# EAGLE board Atmega32_CS_ProgBoard (EAGLE 6.1)
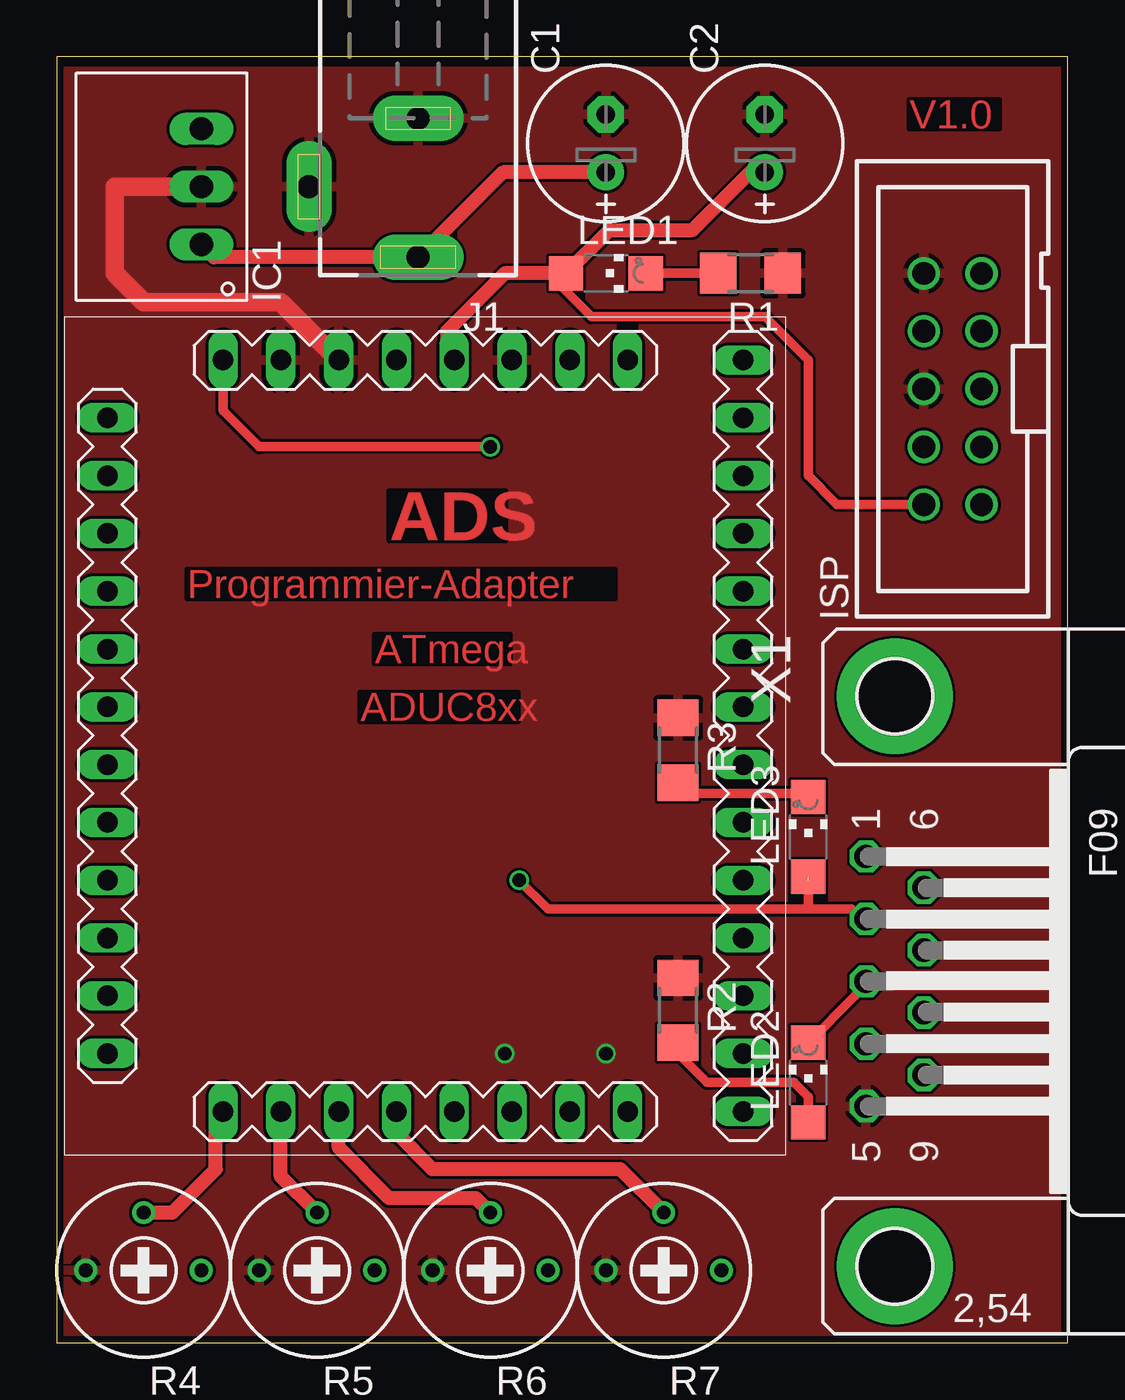
[diagram p0: board, top side]
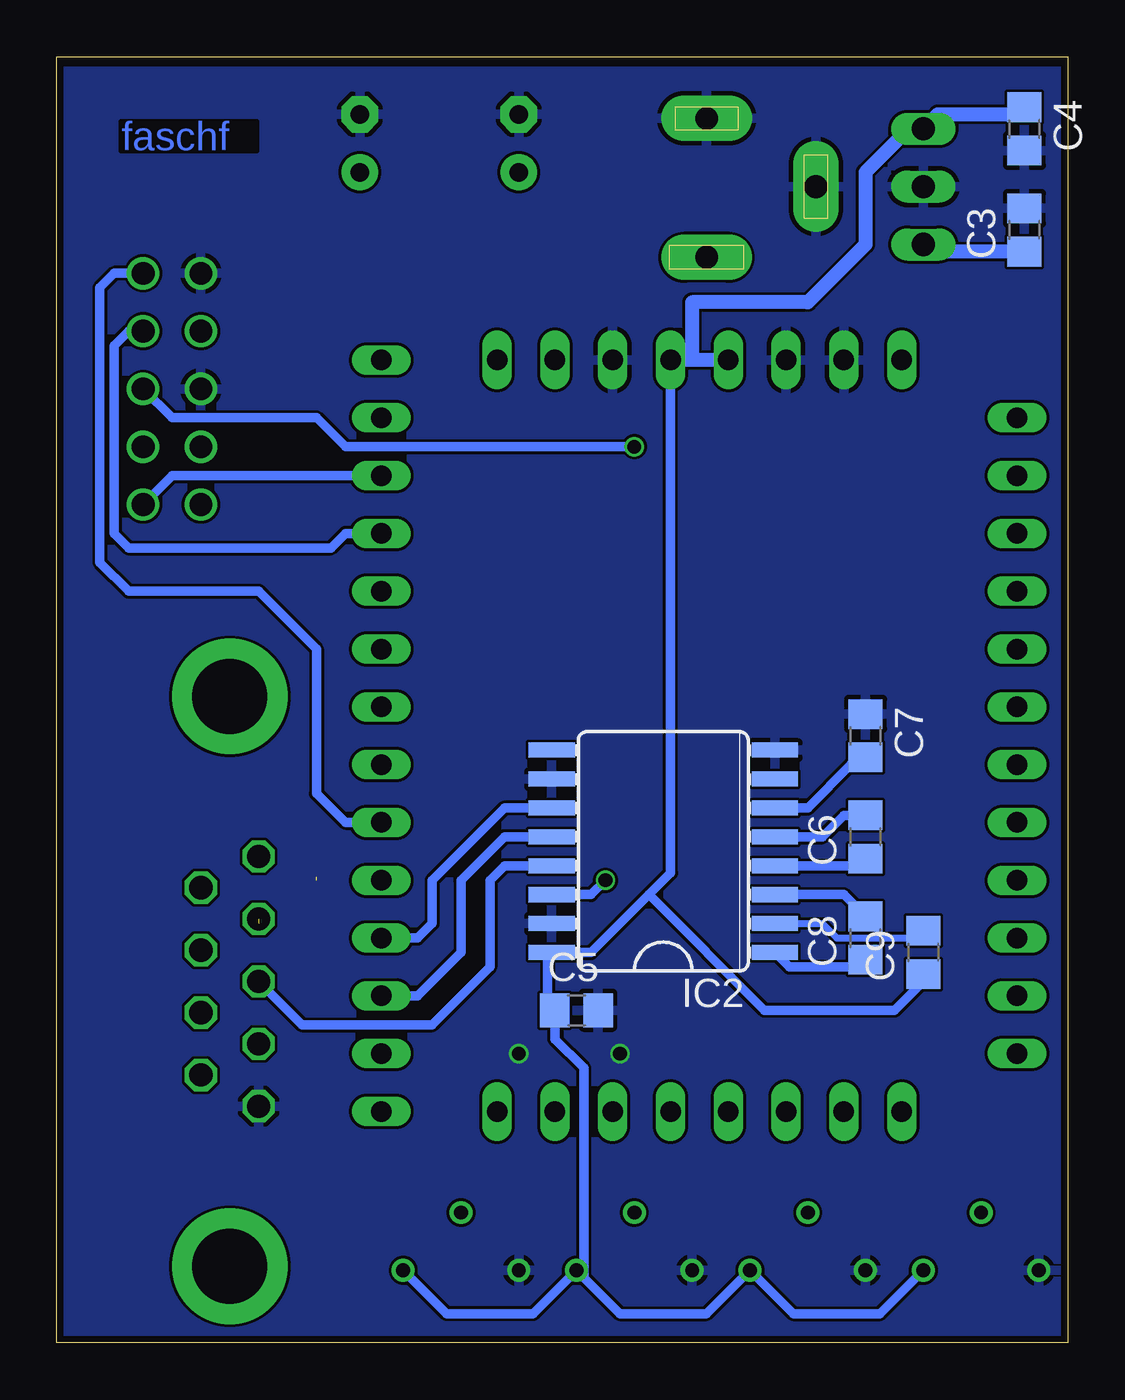
[diagram p1: board, bottom side, seen from below]

Size 44.43 x 56.5 mm. Coordinates in mm from the lower left corner, seen from the top.
Outline: 0,0 44.43,0 44.43,56.5 0,56.5 0,0
Copper layers (1*16): Top 0.035mm / dielectric 1.5mm / Bottom 0.035mm
Design rules: minimum track width 0.125mm, minimum drill 0.2mm, track to track 0.125mm, track to pad 0.125mm, pad to pad 0.125mm, via to via 0.125mm, smd to smd 0.125mm, copper to edge 0.3mm, drill to drill 0.2mm, minimum pad ring 0.2mm, minimum via ring 0.125mm, stop-mask expansion 0.075mm, vias tented up to drill 0mil, thermal gap 0.2mm

## Footprints (pad centres in the part's own frame; a part is rotated, then mirrored left to right if it is on the bottom)
E2,5-7 = drill 0.813 pad 1.6: + -1.27,0 | drill 0.813 pad 1.6 octagon: - 1.27,0
C0805 = smd 1.3 x 1.5: 1 -0.95,0; 2 0.95,0
RECOM_3POL = drill 1.016 long: 1 -2.54,0; 2 0,0; 3 2.54,0
SO16L = smd 0.66 x 2.032: 1 -4.445,-4.902; 2 -3.175,-4.902; 3 -1.905,-4.902; 4 -0.635,-4.902; 5 0.635,-4.902; 6 1.905,-4.902; 7 3.175,-4.902; 8 4.445,-4.902; 9 4.445,4.902; 10 3.175,4.902; 11 1.905,4.902; 12 0.635,4.902; 13 -0.635,4.902; 14 -1.905,4.902; 15 -3.175,4.902; 16 -4.445,4.902
PAK100/2500-10 = drill 1 pad 1.422: 1 -5.08,-1.27; 2 -5.08,1.27; 3 -2.54,-1.27; 4 -2.54,1.27; 5 0,-1.27; 6 0,1.27; 7 2.54,-1.27; 8 2.54,1.27; 9 5.08,-1.27; 10 5.08,1.27
DCJ0202 = drill 1 pad 2 long: 1 0,3.1; 2 4.8,0; 3 0,-3
CHIPLED_1206 = smd 1.5 x 1.5: A 0,-1.75; C 0,1.75
R1206 = smd 1.6 x 1.803: 1 -1.422,0; 2 1.422,0
RTRIM3339P = drill 0.61: 1 -2.54,0; 2 0,-2.54; 3 2.54,0
ADUC_MINIMUM = drill 0.9 long: ADC0 -9.207,-16.51; ADC1 -6.668,-16.51; ADC2 -4.128,-16.51; ADC3 -1.587,-16.51; ADC4 6.032,-16.51; ADC5 8.572,-16.51; ADC6 13.652,-16.51; ADC7 13.652,-13.97; ALE -14.287,6.35; DAC0 0.953,-16.51; DAC1 3.493,-16.51; GND 3.493,16.51; GND2 -4.128,16.51; GND3 -6.668,16.51; INT0 13.652,-6.35; MISO 13.652,-3.81; MOSI 13.652,11.43; P00 -14.287,3.81; P01 -14.287,1.27; P02 -14.287,-1.27; P03 -14.287,-3.81; P04 -14.287,-6.35; P05 -14.287,-8.89; P06 -14.287,-11.43; P07 -14.287,-13.97; P20 13.652,13.97; P21 13.652,16.51; P22 8.572,16.51; P23 6.032,16.51; P24 -9.207,16.51; P25 -14.287,13.97; P34 13.652,-1.27; P35 13.652,1.27; P36 13.652,3.81; P37 13.652,6.35; PWM0 -14.287,11.43; PWM1 -14.287,8.89; RXD 13.652,-11.43; SCLOCK 13.652,8.89; TXD 13.652,-8.89; VCC 0.953,16.51; VCC1 -1.587,16.51
F09HP = drill 1.016 octagon: 1 -5.486,-1.27; 2 -2.743,-1.27; 3 0,-1.27; 4 2.743,-1.27; 5 5.486,-1.27; 6 -4.115,1.27; 7 -1.372,1.27; 8 1.372,1.27; 9 4.115,1.27 | drill 3.302 pad 5.08: G1 -12.522,0; G2 12.522,0

## Placement (x,y rotation side)
C1  10u  [E2,5-7]  24.13,52.7 90 top
C2  10u  [E2,5-7]  31.11,52.7 90 top
C3  100n  [C0805]  1.91,48.9 90 bottom
C4  100n  [C0805]  1.91,53.34 270 bottom
C5  100n  [C0805]  21.59,14.61 0 bottom
C6  100n  [C0805]  8.89,22.23 90 bottom
C7  100n  [C0805]  8.89,26.67 270 bottom
C8  100n  [C0805]  8.89,17.78 90 bottom
C9  100n  [C0805]  6.35,17.14 90 bottom
IC1  78RECOM  [RECOM_3POL]  6.35,50.8 90 top
IC2  MAX3232CWE  [SO16L]  17.78,21.59 90 bottom
ISP  2510-  [PAK100/2500-10]  39.37,41.91 90 top
J1  DCJ0202  [DCJ0202]  15.88,50.8 180 top
LED1  [CHIPLED_1206]  24.13,46.99 270 top
LED2  [CHIPLED_1206]  33.02,11.43 0 top
LED3  [CHIPLED_1206]  33.02,22.23 0 top
R1  220R  [R1206]  30.48,46.99 180 top
R2  1k2  [R1206]  27.3,14.61 270 top
R3  1k2  [R1206]  27.3,26.04 270 top
R4  100k  [RTRIM3339P]  3.81,3.17 180 top
R5  100k  [RTRIM3339P]  11.43,3.17 180 top
R6  100k  [RTRIM3339P]  19.05,3.17 180 top
R7  100k  [RTRIM3339P]  26.67,3.17 180 top
U$1  MEGA32_COMSERVER  [ADUC_MINIMUM]  16.51,26.67 0 top
X1  [F09HP]  36.83,15.88 270 top

## Library data of the parts
C1-C9 R1-R7 = rcl
IC1 = linear
IC2 = maxim
ISP = con-3m
J1 = con-jack
LED1-LED3 = led
U$1 = ADS_ADUCBoards
X1 = con-subd

## Nets
GND: C1.- C2.- C3.2 C4.2 C5.2 C7.1 IC1.2 IC2.8 IC2.10 IC2.15 ISP.6 ISP.10 J1.2 J1.3 R1.1 R2.1 R3.1 R4.3 R5.3 R6.3 R7.3 U$1.GND U$1.GND2 U$1.GND3 X1.5
N$1: ISP.7 U$1.SCLOCK
N$2: C1.+ C3.1 IC1.1 J1.1
N$3: ISP.9 U$1.MISO
N$5: ISP.1 U$1.MOSI
N$6: ISP.5 U$1.P24
N$8: IC2.12 U$1.RXD
N$9: IC2.11 U$1.TXD
N$10: C9.2 IC2.2
N$11: C7.2 IC2.6
N$12: C8.1 IC2.1
N$13: C8.2 IC2.3
N$14: C6.1 IC2.4
N$15: C6.2 IC2.5
N$16: IC2.14 LED3.A X1.2
N$17: IC2.13 LED2.C X1.3
N$18: LED1.C R1.2
N$19: LED2.A R2.2
N$20: LED3.C R3.2
N$21: R4.2 U$1.ADC0
N$22: R5.2 U$1.ADC1
N$23: R6.2 U$1.ADC2
N$24: R7.2 U$1.ADC3
VCC: C2.+ C4.1 C5.1 C9.1 IC1.3 IC2.16 ISP.2 LED1.A R4.1 R5.1 R6.1 R7.1 U$1.VCC U$1.VCC1

## Tracks (layer width: path | path; a pad name or v marks a point on that pad's centre or on a via)
GND  (via drill 0.6)
  Top 0.813: U$1.GND2 9.84,45.72 3.81,45.72 2.54,46.99 2.54,50.8 IC1.2
  Bottom 0.406: 23.5,18.41 IC2.15 | 9.21,27.3 C7.1
  other vias: 19.68,12.7 24.13,12.7
  pour Bottom: 44.45,0 0,0 0,55.88 44.45,55.88
  pour Top: 44.45,0 44.45,55.88 0,55.88 0,0
N$1
  Bottom 0.406: ISP.7 41.27,44.45 41.91,43.81 41.91,35.56 41.27,34.92 32.38,34.92 31.75,35.56 U$1.SCLOCK
N$2
  Top 0.61: IC1.1 6.91,47.7 J1.1 19.61,51.44 C1.+
  Bottom 0.61: C3.1 6.04,47.95 IC1.1
N$3
  Bottom 0.406: ISP.9 41.91,46.99 42.55,46.35 42.55,34.29 41.27,33.02 35.56,33.02 33.02,30.48 33.02,24.13 31.75,22.86 U$1.MISO
N$5
  Bottom 0.406: ISP.1 39.37,38.1 U$1.MOSI
N$6  (via drill 0.6)
  Top 0.406: v19.05,39.37 8.89,39.37 7.3,40.96 U$1.P24
  Bottom 0.406: ISP.5 39.37,40.64 33.02,40.64 31.75,39.37 v19.05,39.37
N$8
  Bottom 0.406: IC2.12 24.77,22.23 26.67,20.32 26.67,17.14 28.57,15.24 U$1.RXD
N$9
  Bottom 0.406: IC2.11 24.77,23.5 27.94,20.32 27.94,18.41 28.57,17.78 U$1.TXD
N$10
  Bottom 0.305: IC2.2 10.79,18.41 10.16,17.78 6.35,17.78
  Bottom 0.406: 6.35,17.78 C9.2
N$11
  Bottom 0.406: IC2.6 11.43,23.5 9.53,25.4 9.21,25.4 C7.2
N$12
  Bottom 0.406: IC2.1 12.24,16.51 8.89,16.51 C8.1
N$13
  Bottom 0.406: IC2.3 9.85,19.68 C8.2
N$14
  Bottom 0.406: IC2.4 8.89,20.95 C6.1
N$15
  Bottom 0.406: IC2.5 10.79,22.23 9.85,23.18 C6.2
N$16  (via drill 0.6)  (2 unrouted)
  Top 0.406: v20.32,20.32 21.59,19.05 33.02,19.05 | 35.51,18.62 X1.2 | 33.02,20.32 33.02,19.05 | 33.02,19.05 34.92,19.05 35.56,18.41
  Bottom 0.406: v20.32,20.32 20.95,19.68 IC2.14
N$17
  Top 0.406: LED2.C 35.08,15.24 X1.3
  Bottom 0.406: X1.3 33.66,13.97 27.94,13.97 25.4,16.51 25.4,20.32 24.77,20.95 IC2.13
N$18
  Top 0.406: LED1.C R1.2
N$19
  Top 0.406: LED2.A 33.02,10.79 32.38,11.43 28.57,11.43 27.3,12.7 R2.2
N$20
  Top 0.406: LED3.C 33.02,24.13 27.79,24.13 R3.2
N$21
  Top 0.61: R4.2 5.08,5.71 6.99,7.62 6.99,9.84 U$1.ADC0
N$22
  Top 0.61: R5.2 9.84,7.3 U$1.ADC1
N$23
  Top 0.61: R6.2 18.41,6.35 14.61,6.35 12.38,8.57 U$1.ADC2
N$24
  Top 0.61: R7.2 24.77,7.62 16.51,7.62 14.92,9.21 U$1.ADC3
VCC
  Top 0.406: ISP.2 34.29,36.83 33.02,38.1 33.02,43.18 31.11,45.09 23.5,45.09 22.23,46.35 22.23,46.99
  Top 0.61: 17.78,43.18 U$1.VCC 17.14,43.18 17.14,44.45 19.68,46.99 22.23,46.99 LED1.A 24.29,48.9 27.94,48.9 30.48,51.44 C2.+
  Bottom 0.406: 18.41,19.68 20.95,17.14 IC2.16 22.86,16.97 22.86,15.24 22.23,14.61 C5.1 22.54,13.34 21.27,12.06 21.27,2.86 R6.1 | 18.41,19.68 17.46,20.64 U$1.VCC | 18.41,19.68 13.34,14.61 7.62,14.61 6.35,15.88 C9.1 | R6.1 23.5,1.27 27.3,1.27 R7.1 | R6.1 19.68,1.27 15.88,1.27 R5.1 12.06,1.27 8.26,1.27 R4.1 | C4.1 1.91,54.61
  Bottom 0.61: 1.91,54.61 2.54,53.98 5.71,53.98 IC1.3 6.99,53.34 8.89,51.44 8.89,48.26 11.43,45.72 16.51,45.72 16.51,43.18 | 14.61,43.18 U$1.VCC1 16.51,43.18 | 16.51,43.18 U$1.VCC 17.78,43.18

## Text on the board
Top: V1.0 | ADS | Programmier-Adapter | ATmega | ADUC8xx
Bottom: faschf